# Altium PCB mypcb.PcbDoc
Units mil, origin at the board's own origin, x right, y up, seen from the top; angles counter-clockwise.
Board outline 20160 x 10575 mil, 2 copper layers (Top Layer, Bottom Layer); 123 components, 204 nets, 930 pads, 0 vias.
Unrouted connection lines stored in the file: 410.
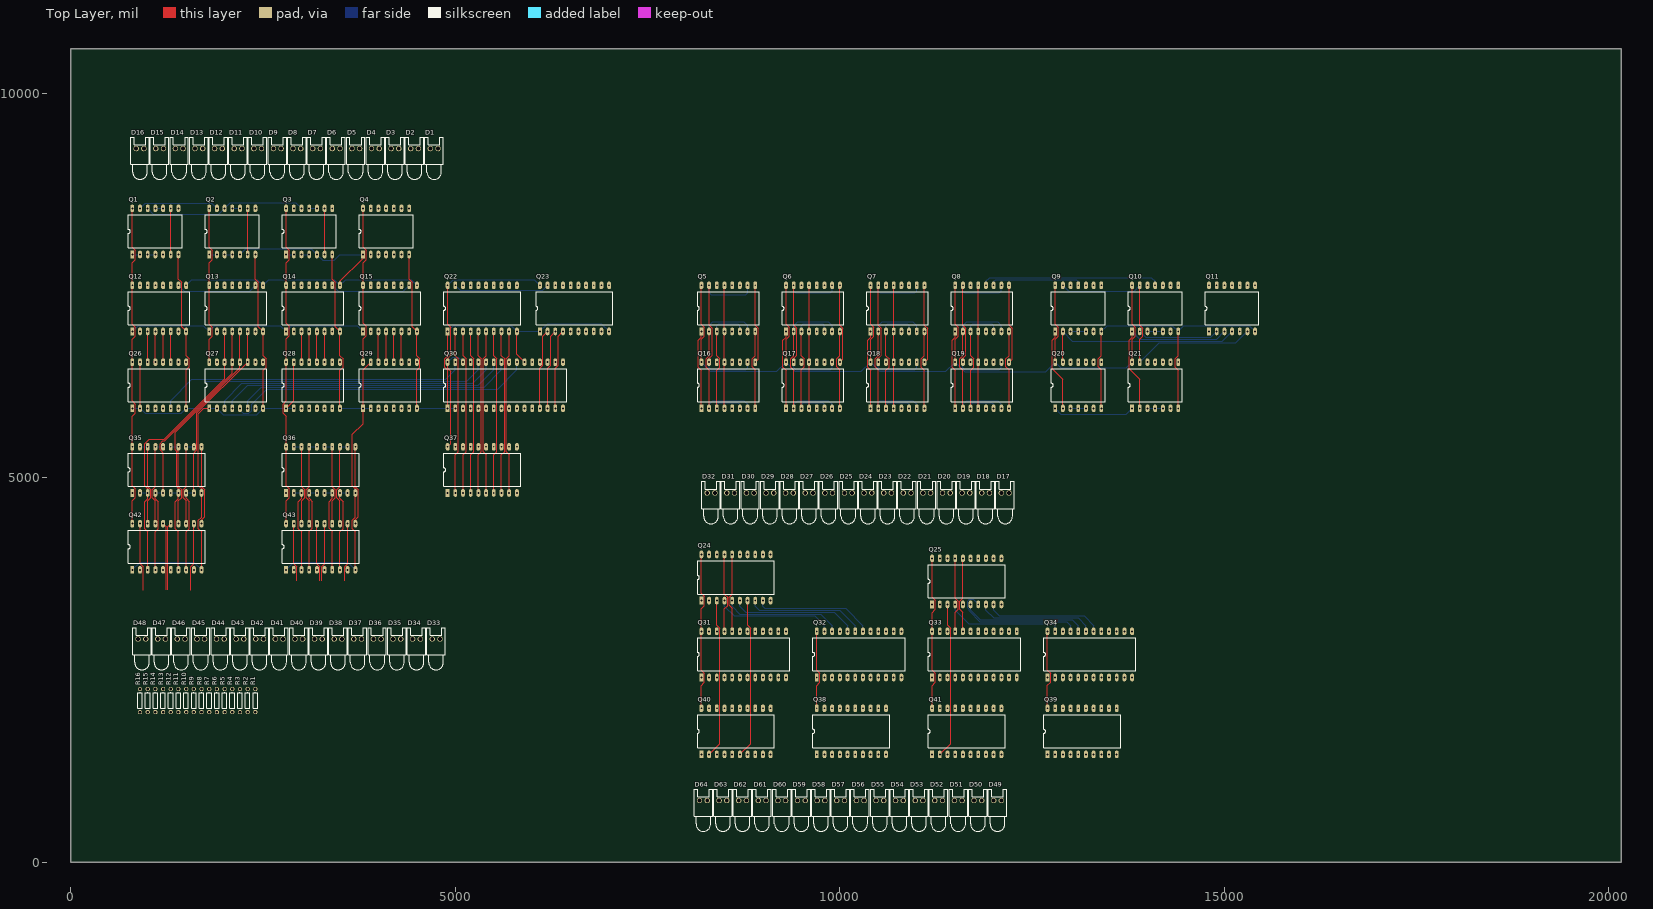
[diagram p0: Top Layer view]
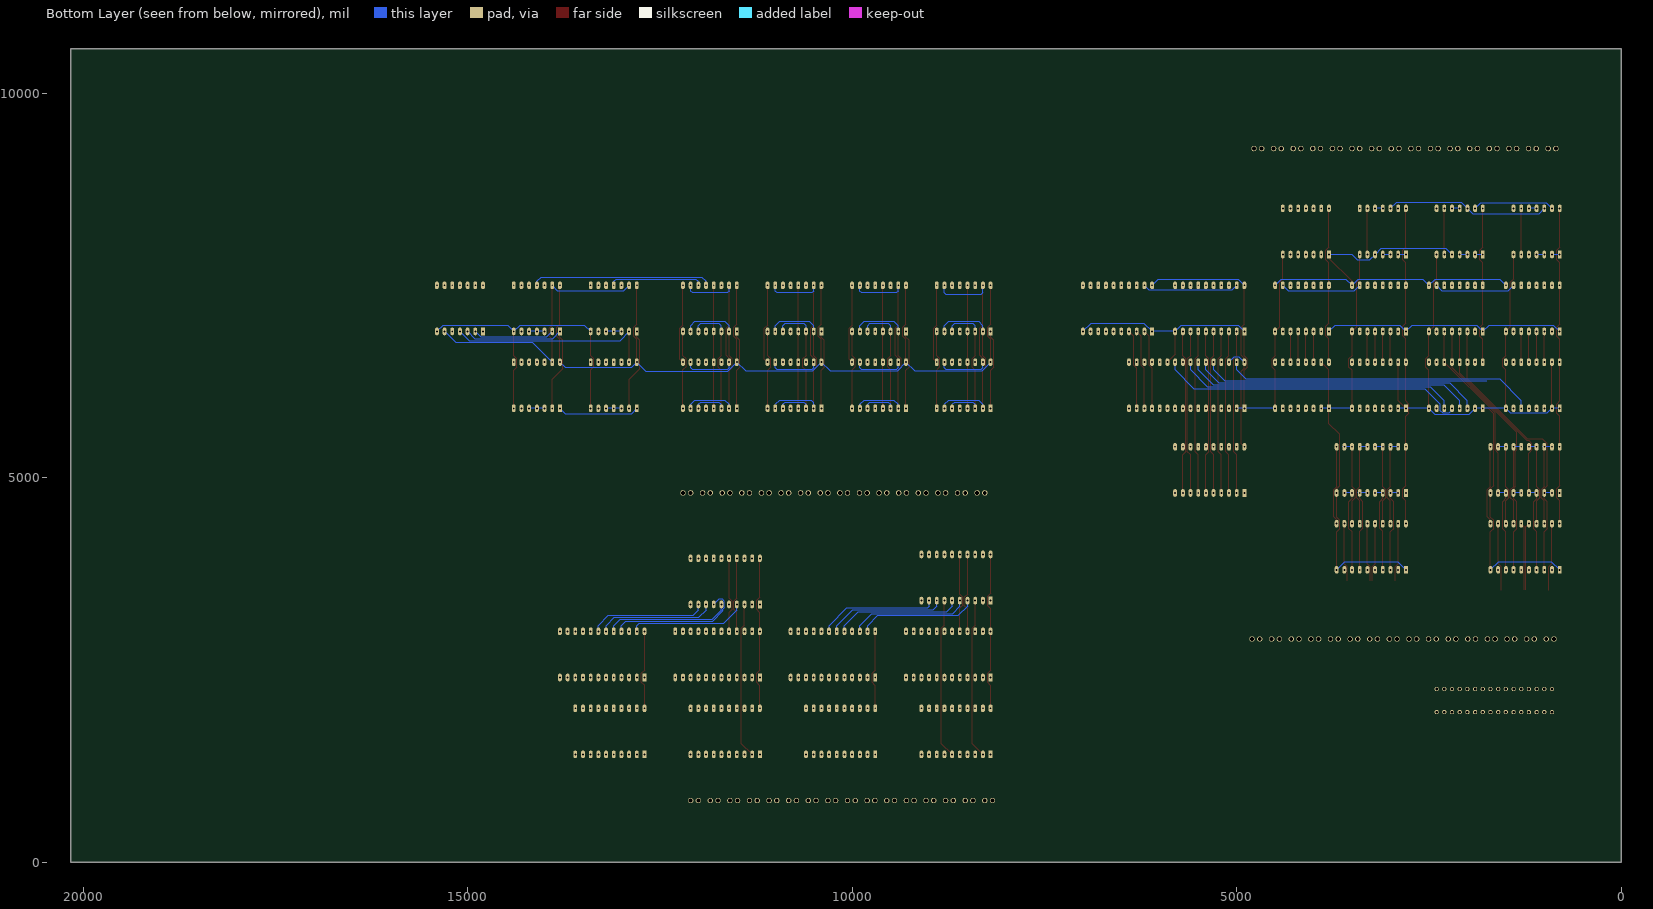
[diagram p1: Bottom Layer view, seen from below]

## Layer stack, top to bottom
Top Solder: solder mask 0.4, Solder Resist, Dk 3.5
Top Layer: signal copper 1.4
Dielectric 1: dielectric 12.6, FR-4, Dk 4.8
Bottom Layer: signal copper 1.4
Bottom Solder: solder mask 0.4, Solder Resist, Dk 3.5

## Board outline
0,0 0,10575 20160,10575 20160,0

## Design rules (kind name [scope] priority, off if disabled: settings)
Clearance [All] p1: gap=10 ignorepadtopadclearanceinfootprint=FALSE except(0: Arc-Hole Track-Hole SMDPad-Hole THPad-Hole Via-Hole Fill-Hole Poly-Hole Region-Hole Text-Hole)
PolygonConnect [All] p1: connectstyle=Relief reliefconductorwidth=10 reliefentries=4 polygonreliefangle="90 Angle" airgapwidth=10
RoutingVias [All] p1: holewidth=28 width=50 viastyle="Through Hole" minholewidth=28 minwidth=50 maxholewidth=28 maxwidth=50
SolderMaskExpansion [All] p1: expansion=4
Width [All] p1: maxlimit=10 minlimit=10 preferedwidth=10
30 further rules are at their usual default settings.

## Components (designator, comment, footprint, x,y, rotation, side; value= is the part's Value field where it differs from the comment)
D1 "LED0" LED-0 4725.15,9277.5 r0 top
D2 "LED0" LED-0 4470.14,9277.5 r0 top
D3 "LED0" LED-0 4215.13,9277.5 r0 top
D4 "LED0" LED-0 3960.12,9277.5 r0 top
D5 "LED0" LED-0 3705.11,9277.5 r0 top
D6 "LED0" LED-0 3450.1,9277.5 r0 top
D7 "LED0" LED-0 3195.09,9277.5 r0 top
D8 "LED0" LED-0 2940.08,9277.5 r0 top
D9 "LED0" LED-0 2685.07,9277.5 r0 top
D10 "LED0" LED-0 2430.06,9277.5 r0 top
D11 "LED0" LED-0 2175.05,9277.5 r0 top
D12 "LED0" LED-0 1920.04,9277.5 r0 top
D13 "LED0" LED-0 1665.03,9277.5 r0 top
D14 "LED0" LED-0 1410.02,9277.5 r0 top
D15 "LED0" LED-0 1155.01,9277.5 r0 top
D16 "LED0" LED-0 900,9277.5 r0 top
D17 "LED0" LED-0 12150,4800 r0 top
D18 "LED0" LED-0 11894.99,4800 r0 top
D19 "LED0" LED-0 11639.98,4800 r0 top
D20 "LED0" LED-0 11384.97,4800 r0 top
D21 "LED0" LED-0 11129.96,4800 r0 top
D22 "LED0" LED-0 10874.95,4800 r0 top
D23 "LED0" LED-0 10619.94,4800 r0 top
D24 "LED0" LED-0 10364.93,4800 r0 top
D25 "LED0" LED-0 10109.92,4800 r0 top
D26 "LED0" LED-0 9854.91,4800 r0 top
D27 "LED0" LED-0 9599.9,4800 r0 top
D28 "LED0" LED-0 9344.89,4800 r0 top
D29 "LED0" LED-0 9089.88,4800 r0 top
D30 "LED0" LED-0 8834.87,4800 r0 top
D31 "LED0" LED-0 8579.86,4800 r0 top
D32 "LED0" LED-0 8324.85,4800 r0 top
D33 "LED0" LED-0 4750,2900 r0 top
D34 "LED0" LED-0 4494.99,2900 r0 top
D35 "LED0" LED-0 4239.98,2900 r0 top
D36 "LED0" LED-0 3984.97,2900 r0 top
D37 "LED0" LED-0 3729.96,2900 r0 top
D38 "LED0" LED-0 3474.95,2900 r0 top
D39 "LED0" LED-0 3219.94,2900 r0 top
D40 "LED0" LED-0 2964.93,2900 r0 top
D41 "LED0" LED-0 2709.92,2900 r0 top
D42 "LED0" LED-0 2454.91,2900 r0 top
D43 "LED0" LED-0 2199.9,2900 r0 top
D44 "LED0" LED-0 1944.89,2900 r0 top
D45 "LED0" LED-0 1689.88,2900 r0 top
D46 "LED0" LED-0 1434.87,2900 r0 top
D47 "LED0" LED-0 1179.86,2900 r0 top
D48 "LED0" LED-0 924.85,2900 r0 top
D49 "LED0" LED-0 12050,800 r0 top
D50 "LED0" LED-0 11794.99,800 r0 top
D51 "LED0" LED-0 11539.98,800 r0 top
D52 "LED0" LED-0 11284.97,800 r0 top
D53 "LED0" LED-0 11029.96,800 r0 top
D54 "LED0" LED-0 10774.95,800 r0 top
D55 "LED0" LED-0 10519.94,800 r0 top
D56 "LED0" LED-0 10264.93,800 r0 top
D57 "LED0" LED-0 10009.92,800 r0 top
D58 "LED0" LED-0 9754.91,800 r0 top
D59 "LED0" LED-0 9499.9,800 r0 top
D60 "LED0" LED-0 9244.89,800 r0 top
D61 "LED0" LED-0 8989.88,800 r0 top
D62 "LED0" LED-0 8734.87,800 r0 top
D63 "LED0" LED-0 8479.86,800 r0 top
D64 "LED0" LED-0 8224.85,800 r0 top
Q1 "7400" DIP14 800,7900 r90 top
Q2 "7400" DIP14 1800,7900 r90 top
Q3 "7400" DIP14 2800,7900 r90 top
Q4 "7404" DIP14 3800,7900 r90 top
Q5 "74LS670" DIP16 8200,6900 r90 top
Q6 "74LS670" DIP16 9300,6900 r90 top
Q7 "74LS670" DIP16 10400,6900 r90 top
Q8 "74LS670" DIP16 11500,6900 r90 top
Q9 "74LS00" DIP14 12800,6900 r90 top
Q10 "74LS00" DIP14 13800,6900 r90 top
Q11 "74LS04" DIP14 14800,6900 r90 top
Q12 "74LS161" DIP16 800,6900 r90 top
Q13 "74LS161" DIP16 1800,6900 r90 top
Q14 "74LS161" DIP16 2800,6900 r90 top
Q15 "74LS161" DIP16 3800,6900 r90 top
Q16 "74LS670" DIP16 8200,5900 r90 top
Q17 "74LS670" DIP16 9300,5900 r90 top
Q18 "74LS670" DIP16 10400,5900 r90 top
Q19 "74LS670" DIP16 11500,5900 r90 top
Q20 "74LS00" DIP14 12800,5900 r90 top
Q21 "74LS00" DIP14 13800,5900 r90 top
Q22 "74LS245" DIP20 4900,6900 r90 top
Q23 "74LS245" DIP20 6100,6900 r90 top
Q24 "74LS373" DIP20 8200,3400 r90 top
Q25 "74LS373" DIP20 11200,3350 r90 top
Q26 "74LS173" DIP16 800,5900 r90 top
Q27 "74LS173" DIP16 1800,5900 r90 top
Q28 "74LS173" DIP16 2800,5900 r90 top
Q29 "74LS173" DIP16 3800,5900 r90 top
Q30 "UM61512A" DIP32 4900,5900 r90 top
Q31 "74LS181" DIP24 8200,2400 r90 top
Q32 "74LS181" DIP24 9700,2400 r90 top
Q33 "74LS181" DIP24 11200,2400 r90 top
Q34 "74LS181" DIP24 12700,2400 r90 top
Q35 "74LS373" DIP20 800,4800 r90 top
Q36 "74LS373" DIP20 2800,4800 r90 top
Q37 "74LS245" DIP20 4900,4800 r90 top
Q38 "74LS373" DIP20 9700,1400 r90 top
Q39 "74LS373" DIP20 12700,1400 r90 top
Q40 "74LS373" DIP20 8200,1400 r90 top
Q41 "74LS373" DIP20 11200,1400 r90 top
Q42 "74LS373" DIP20 800,3800 r90 top
Q43 "74LS373" DIP20 2800,3800 r90 top
R1 "Res1" AXIAL-0.3 2400,2100 r90 top value=1K
R2 "Res1" AXIAL-0.3 2300,2100 r90 top value=1K
R3 "Res1" AXIAL-0.3 2200,2100 r90 top value=1K
R4 "Res1" AXIAL-0.3 2100,2100 r90 top value=1K
R5 "Res1" AXIAL-0.3 2000,2100 r90 top value=1K
R6 "Res1" AXIAL-0.3 1900,2100 r90 top value=1K
R7 "Res1" AXIAL-0.3 1800,2100 r90 top value=1K
R8 "Res1" AXIAL-0.3 1700,2100 r90 top value=1K
R9 "Res1" AXIAL-0.3 1600,2100 r90 top value=1K
R10 "Res1" AXIAL-0.3 1500,2100 r90 top value=1K
R11 "Res1" AXIAL-0.3 1400,2100 r90 top value=1K
R12 "Res1" AXIAL-0.3 1300,2100 r90 top value=1K
R13 "Res1" AXIAL-0.3 1200,2100 r270 top value=1K
R14 "Res1" AXIAL-0.3 1100,2100 r270 top value=1K
R15 "Res1" AXIAL-0.3 1000,2100 r270 top value=1K
R16 "Res1" AXIAL-0.3 900,2100 r270 top value=1K

## Footprints (in the part's own frame and the unit in brackets; to place one, negate y for a bottom-side part, rotate by r counter-clockwise, add the part's x,y. Pads: shape width x height; smd on the part's side, far side on the other; paste and mask are expansions set on the pad)
AXIAL-0.3 [mm] "Axial Device, Thru-Hole; 2 Leads; 0.3 in Pin Spacing"
  round 1.4 hole 0.85: 1(-3.81,0) 2(3.81,0)
  silkscreen extent -2.77,-0.76 2.77,0.76
DIP14 [mil]
  rect 100x50 hole 25: 1(0,0)
  oval 100x50 hole 25: 2(0,-100) 3(0,-200) 4(0,-300) 5(0,-400) 6(0,-500) 7(0,-600) 8(600,-600) 9(600,-500) 10(600,-400) 11(600,-300) 12(600,-200) 13(600,-100) 14(600,0)
  silkscreen extent 85,-650 515,50
DIP16 [mil]
  rect 100x50 hole 25: 1(0,0)
  oval 100x50 hole 25: 2(0,-100) 3(0,-200) 4(0,-300) 5(0,-400) 6(0,-500) 7(0,-600) 8(0,-700) 9(600,-700) 10(600,-600) 11(600,-500) 12(600,-400) 13(600,-300) 14(600,-200) 15(600,-100) 16(600,0)
  silkscreen extent 85,-750 515,50
DIP20 [mil]
  rect 100x50 hole 25: 1(0,0)
  oval 100x50 hole 25: 2(0,-100) 3(0,-200) 4(0,-300) 5(0,-400) 6(0,-500) 7(0,-600) 8(0,-700) 9(0,-800) 10(0,-900) 11(600,-900) 12(600,-800) 13(600,-700) 14(600,-600) 15(600,-500) 16(600,-400) 17(600,-300) 18(600,-200) 19(600,-100) 20(600,0)
  silkscreen extent 85,-950 515,50
DIP24 [mil]
  rect 100x50 hole 25: 1(0,0)
  oval 100x50 hole 25: 2(0,-100) 3(0,-200) 4(0,-300) 5(0,-400) 6(0,-500) 7(0,-600) 8(0,-700) 9(0,-800) 10(0,-900) 11(0,-1000) 12(0,-1100) 13(600,-1100) 14(600,-1000) 15(600,-900) 16(600,-800) 17(600,-700) 18(600,-600) 19(600,-500) 20(600,-400) 21(600,-300) 22(600,-200) 23(600,-100) 24(600,0)
  silkscreen extent 85,-1150 515,50
DIP32 [mil]
  rect 100x50 hole 25: 1(0,0)
  oval 100x50 hole 25: 2(0,-100) 3(0,-200) 4(0,-300) 5(0,-400) 6(0,-500) 7(0,-600) 8(0,-700) 9(0,-800) 10(0,-900) 11(0,-1000) 12(0,-1100) 13(0,-1200) 14(0,-1300) 15(0,-1400) 16(0,-1500) 17(600,-1500) 18(600,-1400) 19(600,-1300) 20(600,-1200) 21(600,-1100) 22(600,-1000) 23(600,-900) 24(600,-800) 25(600,-700) 26(600,-600) 27(600,-500) 28(600,-400) 29(600,-300) 30(600,-200) 31(600,-100) 32(600,0)
  silkscreen extent 85,-1550 515,50
LED-0 [mil] "LED; 2 Leads"
  round 70 hole 50: 1(50,0) 2(-50,0)
  silkscreen extent -120,-400 120,150

## Part data
D1 D2 D3 D4 D5 D6 D7 D8 D9 D10 D11 D12 D13 D14 D15 D16 D17 D18 D19 D20 D21 D22 D23 D24 D25 D26 D27 D28 D29 D30 D31 D32 D33 D34 D35 D36 D37 D38 D39 D40 D41 D42 D43 D44 D45 D46 D47 D48 D49 D50 D51 D52 D53 D54 D55 D56 D57 D58 D59 D60 D61 D62 D63 D64: "Typical INFRARED GaAs LED", LatestRevisionDate=08-Jul-2005, LatestRevisionNote="Mech Layer 1 removed.", PackageDescription="LED; 2 Leads", PackageReference=LED-0, Published=8-Jun-2000, Publisher="Altium Limited"
Q1 Q2 Q3 Q12 Q13 Q14 Q15: "4-BIT BINARY COUNTERS"
Q4 Q11: "Hex Inverting Gates"
Q5 Q6 Q7 Q8 Q16 Q17 Q18 Q19: "4-BY-4 REGISTER FILES WITH 3-STATE OUTPUTS"
Q9 Q10 Q20 Q21: "Quad 2-Input NAND Gate"
Q22 Q23 Q37: "OCTAL BUS TRANSCEIVER"
Q24 Q25 Q35 Q36 Q38 Q39 Q40 Q41 Q42 Q43: "OCTAL TRANSPARENT LATCH WITH 3-STATE OUTPUTS"
Q26 Q27 Q28 Q29: "4-BIT D-TYPE REGISTERS WITH 3-STATE OUTPUTS"
Q30: "64K X 8 BIT HIGH SPEED CMOS SRAM"
Q31 Q32 Q33 Q34: "4-Bit Arithmetic Logic Unit"
R1 R2 R3 R4 R5 R6 R7 R8 R9 R10 R11 R12 R13 R14 R15 R16: "Resistor", LatestRevisionDate=17-Jul-2002, LatestRevisionNote="Re-released for DXP Platform.", PackageDescription="Axial Device, Thru-Hole; 2 Leads; 0.3 in Pin Spacing", PackageReference=AXIAL-0.3, Published=8-Jun-2000, Publisher="Altium Limited"

## Nets (pads, with @x,y where several pads share a name; then routed paths per layer and width w, separated by ;. In a path a pad name is that pad's centre, name@x,y a point inside that pad or via, vN(x,y) a via of type N, cw(c..) or ccw(c..) an arc to the next point about the centre after c; other vN are vias at no path point)
"ALU B0": Q25.2 Q34.1
"ALU B1": Q25.5 Q34.22
"ALU B2": Q25.6 Q34.20 | length 1632.8
  Bottom Layer w10: Q25.6 11700,3275 11825,3150 13025,3150 13100,3075 Q34.20
"ALU B3": Q25.9 Q34.18 | length 1532.8
  Bottom Layer w10: Q25.9 12000,3275 12075,3200 13175,3200 13300,3075 Q34.18
"ALU B4": Q25.12 Q33.1
"ALU B5": Q25.15 Q33.22
"ALU B6": Q25.16 Q33.20 | length 983.1
  Top Layer w10: Q33.20 11600,3250 11560,3290 11560,3391.57 11600,3431.57 Q25.16
"ALU B7": Q25.19 Q33.18
"ALU B8": Q24.2 Q32.1
"ALU B9": Q24.5 Q32.22 | length 1553.6
  Bottom Layer w10: Q24.5 8600,3325 8700,3225 9750,3225 9900,3075 Q32.22
"ALU B10": Q24.6 Q32.20 | length 1678.6
  Bottom Layer w10: Q24.6 8700,3325 8775,3250 9925,3250 10100,3075 Q32.20 Q32.20@10100,2975
"ALU B11": Q24.9 Q32.18 | length 1553.6
  Bottom Layer w10: Q24.9 9000,3325 9025,3300 10075,3300 10300,3075 Q32.18
"ALU B12": Q24.12 Q31.1
"ALU B13": Q24.15 Q31.22
"ALU B14": Q24.16 Q31.20 | length 1033.1
  Top Layer w10: Q31.20 8600,3300 8560,3340 8560,3441.57 8600,3481.57 Q24.16
"ALU B15": Q24.19 Q31.18
"ALU CARRY 0": Q33.7 Q34.16
"ALU CARRY 1": Q32.7 Q33.16
"ALU CARRY 2": Q31.7 Q32.16
"ALU MODE": Q31.8 Q32.8 Q33.8 Q34.8
"ALU OPB WR": Q24.11 Q25.11
"ALU OUT 0": Q34.9 Q39.3 Q41.3
"ALU OUT 1": Q34.10 Q39.4 Q41.4
"ALU OUT 2": Q34.11 Q39.7 Q41.7
"ALU OUT 3": Q34.13 Q39.8 Q41.8
"ALU OUT 4": Q33.9 Q39.13 Q41.13
"ALU OUT 5": Q33.10 Q39.14 Q41.14
"ALU OUT 6": Q33.11 Q39.17 Q41.17
"ALU OUT 7": Q33.13 Q39.18 Q41.18
"ALU OUT 8": Q32.9 Q38.3 Q40.3
"ALU OUT 9": Q32.10 Q38.4 Q40.4
"ALU OUT 10": Q32.11 Q38.7 Q40.7
"ALU OUT 11": Q32.13 Q38.8 Q40.8
"ALU OUT 12": Q31.9 Q38.13 Q40.13
"ALU OUT 13": Q31.10 Q38.14 Q40.14
"ALU OUT 14": Q31.11 Q38.17 Q40.17
"ALU OUT 15": Q31.13 Q38.18 Q40.18
"ALU OUT R": Q38.1 Q39.1
"ALU OUT WR": Q38.11 Q39.11 Q40.11 Q41.11
"ALU SEL 0": Q31.6 Q32.6 Q33.6 Q34.6
"ALU SEL 1": Q31.5 Q32.5 Q33.5 Q34.5
"ALU SEL 2": Q31.4 Q32.4 Q33.4 Q34.4
"ALU SEL 3": Q31.3 Q32.3 Q33.3 Q34.3
"BUS 0": Q8.10 Q8.15 Q15.3 Q19.10 Q19.15 Q23.2 Q25.3 Q25.10 Q29.14 Q30.13 Q34.2 Q36.2 Q36.3 Q37.18 Q39.2 Q43.3 | length 7018.7
  Top Layer w10: Q43.3 3000,4295 2960,4335 2960,4688.28 3000,4728.28 Q36.3 ; Q29.14@4000,6480 Q29.14 Q15.3 ; Q30.13 6100,6418.43 6140,6458.43 6140,6840 Q23.2 ; 11300,1400 11440,1540 11440,3041.57 11400,3081.57 Q25.3 ; Q19.15 11600,6553.28 11640,6593.28 11640,6941.57 11600,6981.57 Q8.15
  Bottom Layer w10: Q36.2 Q36.3 3025,4800 ; Q19.15 11600,6425 11625,6400 12075,6400 12100,6425 Q19.10 ; Q8.15 11600,7425 11625,7400 12075,7400 12100,7425 Q8.10
"BUS 1": Q8.1 Q8.9 Q15.4 Q19.1 Q19.9 Q23.3 Q25.4 Q29.13 Q30.14 Q34.23 Q36.4 Q36.5 Q37.17 Q39.5 Q43.4 | length 6227
  Top Layer w10: Q43.4 3100,4300 3140,4340 3140,4688.28 3100,4728.28 Q36.4 ; Q15.4 Q29.13 Q29.13@4120,6480 ; Q30.14 6200,6418.43 6240,6458.43 6240,6840 Q23.3 ; Q19.1@11500,5875 Q19.1 11500,6395 11460,6435 11460,6783.28 11500,6823.28 Q8.1 ; Q19.9 12240,6540 12240,6941.57 12200,6981.57 Q8.9
  Bottom Layer w10: Q36.4 Q36.5 ; Q25.4 11500,3275 11675,3100 12775,3100 12800,3075 Q34.23
"BUS 2": Q8.2 Q8.7 Q15.5 Q19.2 Q19.7 Q23.4 Q25.7 Q29.12 Q30.15 Q34.21 Q36.6 Q36.7 Q37.16 Q39.6 Q43.7 | length 6819.7
  Top Layer w10: Q43.7 3400,4300 3360,4340 3360,4688.28 3400,4728.28 Q36.7 ; Q29.12@4200,6480 Q29.12 Q15.5 ; Q30.15 6300,6418.43 6340,6458.43 6340,6840 Q23.4 ; Q19.2@11600,5875 Q19.2 11600,6395 11560,6435 11560,6541.57 11600,6581.57 Q8.2
  Bottom Layer w10: Q36.6 Q36.7 3425,4800 ; Q19.2 11600,5950 11650,6000 12050,6000 12100,5950 Q19.7 ; Q8.2 11600,6975 11650,7025 12050,7025 12100,6975 Q8.7 Q8.7@12100,6875 ; Q25.7 11735,3415 11683.43,3415 11660,3391.57 11660,3308.43 11680,3288.43 11680,3266.72 11821.72,3125 12950,3125 13000,3075 Q34.21
"BUS 3": Q8.3 Q8.6 Q15.6 Q19.3 Q19.6 Q23.5 Q25.8 Q29.11 Q30.17 Q34.19 Q36.8 Q36.9 Q37.15 Q39.9 Q43.8 | length 5043.8
  Top Layer w10: Q43.8 3500,4295 3540,4335 3540,4688.28 3500,4728.28 Q36.8 ; Q15.6 Q29.11 Q29.11@4320,6480 ; Q19.3 11700,6395 11740,6435 11740,6541.57 11700,6581.57 Q8.3
  Bottom Layer w10: Q36.8 Q36.9 ; Q19.3 11700,5950 11725,5975 11975,5975 12000,5950 Q19.6 ; Q8.3 11700,6975 11725,7000 11975,7000 12000,6975 Q8.6 Q8.6@12000,6875 ; Q25.8 11900,3275 12000,3175 13100,3175 13200,3075 Q34.19
"BUS 4": Q7.10 Q7.15 Q14.3 Q18.10 Q18.15 Q23.6 Q25.13 Q28.14 Q30.18 Q33.2 Q36.12 Q36.13 Q37.14 Q39.12 Q43.13 | length 3977.7
  Top Layer w10: Q28.14@3000,6480 Q28.14 Q14.3 ; Q43.13 3500,4700 3460,4740 3460,4841.57 3500,4881.57 Q36.13 ; Q18.15 10500,6553.28 10540,6593.28 10540,6941.57 10500,6981.57 Q7.15
  Bottom Layer w10: Q36.13 Q36.12 3625,5400 ; Q18.15 10500,6425 10525,6400 10975,6400 11000,6425 Q18.10 Q18.10@11000,6525 ; Q7.15 10500,7425 10525,7400 10975,7400 11000,7425 Q7.10
"BUS 5": Q7.1 Q7.9 Q14.4 Q18.1 Q18.9 Q23.7 Q25.14 Q28.13 Q30.19 Q33.23 Q36.14 Q36.15 Q37.13 Q39.15 Q43.14 | length 3639.4
  Top Layer w10: Q28.13@3100,6480 Q28.13 Q14.4 ; Q43.14 3400,4700 3440,4740 3440,4841.57 3400,4881.57 Q36.14 ; Q18.1 10400,6395 10360,6435 10360,6783.28 10400,6823.28 Q7.1 ; Q18.9@11080,6500 Q18.9 11140,6540 11140,6941.57 11100,6981.57 Q7.9
  Bottom Layer w10: Q36.15 Q36.14
"BUS 6": Q7.2 Q7.7 Q14.5 Q18.2 Q18.7 Q23.8 Q25.17 Q28.12 Q30.20 Q33.21 Q36.16 Q36.17 Q37.12 Q39.16 Q43.17 | length 4900.2
  Top Layer w10: Q43.17 3100,4700 3060,4740 3060,4841.57 3100,4881.57 Q36.17 ; Q14.5 Q28.12 Q28.12@3220,6480 ; Q18.2 10500,6400 10460,6440 10460,6541.57 10500,6581.57 Q7.2 ; Q33.21 11500,3250 11540,3290 11540,3391.57 11500,3431.57 Q25.17
  Bottom Layer w10: Q36.17 Q36.16 3225,5400 ; Q18.2 10500,5975 10525,6000 10950,6000 11000,5950 ; Q7.2 10500,6975 10550,7025 10950,7025 11000,6975 Q7.7
"BUS 7": Q7.3 Q7.6 Q14.6 Q18.3 Q18.6 Q23.9 Q25.18 Q28.11 Q30.21 Q33.19 Q36.18 Q36.19 Q37.11 Q39.19 Q43.18 | length 3462.7
  Top Layer w10: Q43.18 3000,4700 3040,4740 3040,4841.57 3000,4881.57 Q36.18 ; Q28.11@3300,6520 Q14.6 ; Q18.3 10600,6395 10640,6435 10640,6541.57 10600,6581.57 Q7.3
  Bottom Layer w10: Q36.19 Q36.18 3025,5400 ; Q18.3 10600,5950 10625,5975 10875,5975 10900,5950 Q18.6@10900,5925 ; Q7.3 10600,6975 10625,7000 10875,7000 10900,6975 Q7.6 Q7.6@10900,6875
"BUS 8": Q6.10 Q6.15 Q13.3 Q17.10 Q17.15 Q22.2 Q24.3 Q27.14 Q32.2 Q35.2 Q35.3 Q37.2 Q38.2 Q42.3 | length 10386.3
  Top Layer w10: Q42.3 1000,4295 960,4335 960,4683.28 1000,4723.28 Q35.3 1000,4853.28 960,4893.28 960,5441.57 1018.43,5500 1215.15,5500 2000,6284.85 Q27.14 ; Q13.3 2000,6520 Q27.14@2020,6500 ; Q37.2 5000,5295 5040,5335 5040,6541.57 5000,6581.57 Q22.2 ; 8300,1400 8440,1540 8440,3041.57 8400,3081.57 Q24.3 ; Q17.15 9400,6553.28 9440,6593.28 9440,6941.57 9400,6981.57 Q6.15
  Bottom Layer w10: Q35.2 Q35.3 ; Q17.15 9400,6425 9425,6400 9875,6400 9900,6425 Q17.10 ; Q6.15 9400,7425 9425,7400 9875,7400 9900,7425 Q6.10
"BUS 9": Q6.1 Q6.9 Q13.4 Q17.1 Q17.9 Q22.3 Q24.4 Q27.13 Q32.23 Q35.4 Q35.5 Q37.3 Q38.5 Q42.4 | length 9431.7
  Top Layer w10: Q42.4 1100,4295 1140,4335 1140,4683.28 1100,4723.28 Q35.4 ; Q35.5 1200,5318.43 1160,5358.43 1160,5441.57 1198.43,5480 1223.43,5480 2100,6356.57 Q27.13 Q13.4 ; Q37.3 5100,5295 5140,5335 5140,6541.57 5100,6581.57 Q22.3 ; Q17.1@9300,5875 Q17.1 9300,6395 9260,6435 9260,6783.28 9300,6823.28 Q6.1 ; Q17.9 10040,6540 10040,6941.57 10000,6981.57 Q6.9
  Bottom Layer w10: Q35.4 Q35.5 ; Q24.4 8500,3325 8625,3200 9675,3200 9800,3075 Q32.23
"BUS 10": Q6.2 Q6.7 Q13.5 Q17.2 Q17.7 Q22.4 Q24.7 Q27.12 Q32.21 Q35.6 Q35.7 Q37.4 Q38.6 Q42.7 | length 10146.3
  Top Layer w10: Q42.7 1400,4295 1360,4335 1360,4683.28 1400,4723.28 Q35.7 1400,4853.28 1375,4878.28 1375,5343.43 1360,5358.43 1360,5588.28 2200,6428.28 Q27.12 Q13.5 ; Q37.4 5200,5295 5240,5335 5240,6541.57 5200,6581.57 Q22.4 ; 8700,1400 8840,1540 8840,3041.57 8800,3081.57 Q24.7 ; Q17.2 9400,6395 9360,6435 9360,6541.57 9400,6581.57 Q6.2
  Bottom Layer w10: Q35.6 Q35.7 ; Q17.2 9400,5950 9450,6000 9850,6000 9900,5950 Q17.7 Q17.7@9900,5875 ; Q6.2 9400,6975 9450,7025 9850,7025 9900,6975 9900,6950
"BUS 11": Q6.3 Q6.6 Q13.6 Q17.3 Q17.6 Q22.5 Q24.8 Q27.11 Q32.19 Q35.8 Q35.9 Q37.5 Q38.9 Q42.8 | length 9134.3
  Top Layer w10: Q42.8 1500,4295 1540,4335 1540,4688.28 1500,4728.28 Q35.8 ; Q35.9 1600,5318.43 1640,5358.43 1640,5840 Q27.11 Q13.6 ; Q37.5 5300,5295 5340,5335 5340,6541.57 5300,6581.57 Q22.5 ; Q17.3 9500,6400 9540,6440 9540,6541.57 9500,6581.57 Q6.3
  Bottom Layer w10: Q35.8 Q35.9 ; Q24.8 8900,3325 8950,3275 10000,3275 10200,3075 Q32.19 Q32.19@10200,2975 ; Q17.3 9500,5950 9525,5975 9775,5975 9800,5950 Q17.6 ; Q6.3 9500,6975 9525,7000 9775,7000 9800,6975 Q6.6@9800,6925
"BUS 12": Q5.10 Q5.15 Q12.3 Q16.10 Q16.15 Q22.6 Q24.13 Q26.14 Q31.2 Q35.12 Q35.13 Q37.6 Q38.12 Q42.13 | length 6065.8
  Top Layer w10: Q26.14 Q12.3 ; Q42.13 1500,4700 1460,4740 1460,4841.57 1500,4881.57 Q35.13 ; Q37.6 5400,5295 5360,5335 5360,6541.57 5400,6581.57 Q22.6 ; Q16.15 8300,6553.28 8340,6593.28 8340,6941.57 8300,6981.57 Q5.15
  Bottom Layer w10: Q35.13 Q35.12@1575,5400 ; Q16.15 8300,6425 8325,6400 8775,6400 8800,6425 Q16.10 ; Q5.15 8300,7400 8325,7375 8775,7375 8800,7400 Q5.10
"BUS 13": Q5.1 Q5.9 Q12.4 Q16.1 Q16.9 Q22.7 Q24.14 Q26.13 Q31.23 Q35.14 Q35.15 Q37.7 Q38.15 Q42.14 | length 5740.8
  Top Layer w10: Q26.13@1080,6500 1100,6520 Q12.4 ; Q42.14 1400,4695 1440,4735 1440,4841.57 1400,4881.57 Q35.14 ; Q37.7 5500,5295 5540,5335 5540,6541.57 5500,6581.57 Q22.7 ; Q16.1 8200,6395 8160,6435 8160,6783.28 8200,6823.28 Q5.1 ; Q16.9 8940,6540 8940,6941.57 8900,6981.57 Q5.9
  Bottom Layer w10: Q35.15 Q35.14
"BUS 14": Q5.2 Q5.7 Q12.5 Q16.2 Q16.7 Q22.8 Q24.17 Q26.12 Q31.21 Q35.16 Q35.17 Q37.8 Q38.16 Q42.17 | length 7015.4
  Top Layer w10: Q42.17 1100,4695 1060,4735 1060,4841.57 1100,4881.57 Q35.17 ; Q26.12 Q12.5 ; Q37.8 5600,5295 5640,5335 5640,6541.57 5600,6581.57 Q22.8 ; Q16.2 8300,6395 8260,6435 8260,6541.57 8300,6581.57 Q5.2 ; Q31.21 8500,3295 8540,3335 8540,3441.57 8500,3481.57 Q24.17
  Bottom Layer w10: Q35.17 Q35.16 ; Q16.2 8300,5950 8350,6000 8750,6000 8800,5950 ; Q5.2 8300,6975 8350,7025 8750,7025 8800,6975 Q5.7
"BUS 15": Q5.3 Q5.6 Q12.6 Q16.3 Q16.6 Q22.9 Q24.18 Q26.11 Q31.19 Q35.18 Q35.19 Q37.9 Q38.19 Q42.18 | length 5590.8
  Top Layer w10: Q42.18@1000,4375 Q42.18 1000,4695 1040,4735 1040,4841.57 1000,4881.57 Q35.18 ; Q26.11 Q12.6 ; Q37.9 5700,5295 5660,5335 5660,6541.57 5700,6581.57 Q22.9 ; Q16.3 8400,6395 8440,6435 8440,6541.57 8400,6581.57 Q5.3
  Bottom Layer w10: Q35.19 Q35.18 1025,5400 ; Q16.3 8400,5950 8425,5975 8675,5975 8700,5950 ; Q5.3 8400,6975 8425,7000 8675,7000 8700,6975 Q5.6
CLK: Q1.12 Q2.12 Q3.12 Q15.2 | length 2124.3
  Bottom Layer w10: Q1.12 1075,8425 1925,8425 Q2.12 2075,8575 2925,8575 Q3.12
"GATE PC": Q22.19 Q23.19 | length 1253.8
  Bottom Layer w10: Q22.19 5065,7435 6135,7435 Q23.19
GND: D17.2 D18.2 D19.2 D20.2 D21.2 D22.2 D23.2 D24.2 D25.2 D26.2 D27.2 D28.2 D29.2 D30.2 D31.2 D32.2 D49.2 D50.2 D51.2 D52.2 D53.2 D54.2 D55.2 D56.2 D57.2 D58.2 D59.2 D60.2 D61.2 D62.2 D63.2 D64.2 Q1.7 Q2.7 Q3.7 Q4.7 Q5.8 Q6.8 Q7.8 Q8.8 Q9.7 Q10.7 Q11.7 Q12.8 Q13.8 Q14.8 Q15.8 Q16.8 Q17.8 Q18.8 Q19.8 Q20.7 Q21.7 Q22.1 Q22.10 Q23.1 Q23.10 Q24.1 Q24.10 Q25.1 Q26.1 Q26.2 Q26.8 Q26.15 Q27.1 Q27.2 Q27.8 Q27.15 Q28.1 Q28.2 Q28.8 Q28.15 Q29.1 Q29.2 Q29.8 Q29.15 Q30.1 Q30.2 Q30.16 Q30.22 Q31.12 Q32.12 Q33.12 Q34.12 Q35.10 Q36.10 Q37.10 Q38.10 Q39.10 Q40.1 Q40.10 Q41.1 Q41.10 Q42.1 Q42.10 Q43.1 Q43.10 R1.1 R2.1 R3.1 R4.1 R5.1 R6.1 R7.1 R8.1 R9.1 R10.1 R11.1 R12.1 R13.1 R14.1 R15.1 R16.1 | length 31767
  Top Layer w10: Q26.2 Q26.15 ; Q1.7 1400,7580 1415,7565 1416.57,7565 1440,7541.57 1440,6960 Q12.8 1500,6581.57 1540,6541.57 1540,6440 1500,6400 Q26.8 ; Q42.10 1700,4295 1660,4335 1660,4441.57 1700,4481.57 Q35.10 1700,4853.28 1660,4893.28 1660,5831.72 1728.28,5900 Q27.1 ; Q2.7 2400,7581.57 2440,7541.57 2440,6960 Q13.8 2500,6581.57 2540,6541.57 2540,6435 2500,6395 Q27.8 ; Q28.1 2900,6000 Q28.15 ; Q3.7 3400,7581.57 3440,7541.57 3440,6960 Q14.8 3500,6581.57 3540,6541.57 3540,6435 3500,6395 Q28.8 ; Q43.10 3700,4295 3660,4335 3660,4441.57 3700,4481.57 Q36.10 3700,4853.28 3660,4893.28 3660,5560 3800,5700 Q29.1 3800,6400 Q29.15 ; Q4.7 4400,7581.57 4440,7541.57 4440,6960 Q15.8 4500,6581.57 4540,6541.57 4540,6435 4500,6395 Q29.8 ; Q30.1 4900,6395 4860,6435 4860,6541.57 4900,6581.57 Q22.1 ; Q22.10 5800,6600 Q30.22 ; Q16.8 8900,6395 ; 8900,6400 8860,6440 8860,6541.57 8900,6581.57 Q5.8 ; Q17.8 10000,6400 9960,6440 9960,6541.57 10000,6581.57 Q6.8 ; Q18.8 11100,6395 11060,6435 11060,6541.57 11100,6581.57 Q7.8 ; Q19.8 12200,6400 12160,6440 12160,6541.57 12200,6581.57 Q8.8 ; Q20.7 13400,6400 13360,6440 13360,6541.57 13400,6581.57 Q9.7 ; Q21.7 14400,6395 14360,6435 14360,6541.57 14400,6581.57 Q10.7
  Bottom Layer w10: Q42.1 900,3900 1600,3900 Q42.10 ; Q26.1 Q26.2 965,5835 1435,5835 Q26.8 Q27.1 Q27.2 1985,5815 2415,5815 Q27.8 Q28.1 Q28.2 ; Q43.1 2900,3900 3600,3900 Q43.10 ; Q28.8 Q29.1 Q29.2 ; Q29.8 Q30.1 Q30.2 ; Q22.1 4975,6975 5725,6975 Q22.10 Q23.1 6200,7000 6900,7000 Q23.10 ; Q9.7 13475,6975 14325,6975 Q10.7 14475,6975 15325,6975 Q11.7
"LED ALU 0": D49.1 Q41.2
"LED ALU 1": D50.1 Q41.5
"LED ALU 2": D51.1 Q41.6
"LED ALU 3": D52.1 Q41.9
"LED ALU 4": D53.1 Q41.12
"LED ALU 5": D54.1 Q41.15
"LED ALU 6": D55.1 Q41.16
"LED ALU 7": D56.1 Q41.19
"LED ALU 8": D57.1 Q40.2
"LED ALU 9": D58.1 Q40.5
"LED ALU 10": D59.1 Q40.6
"LED ALU 11": D60.1 Q40.9
"LED ALU 12": D61.1 Q40.12
"LED ALU 13": D62.1 Q40.15
"LED ALU 14": D63.1 Q40.16
"LED ALU 15": D64.1 Q40.19
"LED ALU B0": D17.1
"LED ALU B1": D18.1
"LED ALU B2": D19.1
"LED ALU B3": D20.1
"LED ALU B4": D21.1
"LED ALU B5": D22.1
"LED ALU B6": D23.1
"LED ALU B7": D24.1
"LED ALU B8": D25.1
"LED ALU B9": D26.1
"LED ALU B10": D27.1
"LED ALU B11": D28.1
"LED ALU B12": D29.1
"LED ALU B13": D30.1
"LED ALU B14": D31.1
"LED ALU B15": D32.1
"LED MDR 0": D33.1 Q43.2
"LED MDR 1": D34.1 Q43.5
"LED MDR 2": D35.1 Q43.6
"LED MDR 3": D36.1 Q43.9
"LED MDR 4": D37.1 Q43.12 | length 756.6
  Top Layer w10: 3560,3660 3560,3841.57 3600,3881.57 Q43.12
"LED MDR 5": D38.1 Q43.15 | length 756.6
  Top Layer w10: 3260,3660 3260,3841.57 3300,3881.57 Q43.15
"LED MDR 6": D39.1 Q43.16 | length 756.6
  Top Layer w10: Q43.16 3200,3881.57 3240,3841.57 3240,3660
"LED MDR 7": D40.1 Q43.19 | length 756.6
  Top Layer w10: Q43.19 2900,3881.57 2940,3841.57 2940,3660
"LED MDR 8": D41.1 Q42.2
"LED MDR 9": D42.1 Q42.5
"LED MDR 10": D43.1 Q42.6
"LED MDR 11": D44.1 Q42.9
"LED MDR 12": D45.1 Q42.12 | length 881.6
  Top Layer w10: 1560,3535 1560,3841.57 1600,3881.57 Q42.12
"LED MDR 13": D46.1 Q42.15 | length 876.6
  Top Layer w10: 1260,3540 1260,4360 Q42.15
"LED MDR 14": D47.1 Q42.16 | length 876.6
  Top Layer w10: Q42.16 1240,4360 1240,3540
"LED MDR 15": D48.1 Q42.19 | length 881.6
  Top Layer w10: Q42.19 900,3881.57 940,3841.57 940,3535
"LED PC 0": D1.2 Q15.14 Q23.18
"LED PC 1": D2.2 Q15.13 Q23.17
"LED PC 2": D3.2 Q15.12 Q23.16
"LED PC 3": D4.2 Q15.11 Q23.15
"LED PC 4": D5.2 Q14.14 Q23.14
"LED PC 5": D6.2 Q14.13 Q23.13
"LED PC 6": D7.2 Q14.12 Q23.12
"LED PC 7": D8.2 Q14.11 Q23.11
"LED PC 8": D9.2 Q13.14 Q22.18
"LED PC 9": D10.2 Q13.13 Q22.17
"LED PC 10": D11.2 Q13.12 Q22.16
"LED PC 11": D12.2 Q13.11 Q22.15
"LED PC 12": D13.2 Q12.14 Q22.14
"LED PC 13": D14.2 Q12.13 Q22.13
"LED PC 14": D15.2 Q12.12 Q22.12
"LED PC 15": D16.2 Q12.11 Q22.11
"MAR 0": Q29.3 Q30.12
"MAR 1": Q29.4 Q30.11
"MAR 2": Q29.5 Q30.10
"MAR 3": Q29.6 Q30.9
"MAR 4": Q28.3 Q30.8
"MAR 5": Q28.4 Q30.7
"MAR 6": Q28.5 Q30.6
"MAR 7": Q28.6 Q30.5
"MAR 8": Q27.3 Q30.27 | length 3765.7
  Bottom Layer w10: Q27.3 2000,6000 2225,6225 5225,6225 5400,6400 Q30.27
"MAR 9": Q27.4 Q30.26 | length 3765.7
  Bottom Layer w10: Q27.4 2100,6000 2300,6200 2900,6200 5271.72,6200 5300,6200 5500,6400 Q30.26
"MAR 10": Q27.5 Q30.23 | length 4023.4
  Bottom Layer w10: Q27.5 2200,5875 2240,5835 2316.57,5835 2350,5868.43 2350,5950 2550,6150 5550,6150 5800,6400 Q30.23
"MAR 11": Q27.6 Q30.25 | length 3665.7
  Bottom Layer w10: Q27.6 2300,6000 2475,6175 5286.99,6175 5375,6175 5600,6400 Q30.25
"MAR 12": Q26.3 Q30.4
"MAR 13": Q26.4 Q30.28 | length 3712.1
  Bottom Layer w10: 1750,6250 5150,6250 5300,6400 Q30.28
"MAR 14": Q26.5 Q30.3
"MAR 15": Q26.6 Q30.31 | length 4065.7
  Bottom Layer w10: Q26.6 1300,6000 1575,6275 4875,6275 5000,6400 Q30.31
"MDR R": Q35.1 Q36.1
"MDR W": Q35.11 Q36.11 Q42.11 Q43.11 | length 2066.3
  Top Layer w10: Q42.11 1700,4453.28 1740,4493.28 1740,4841.57 1700,4881.57 Q35.11 ; Q43.11 3700,4453.28 3740,4493.28 3740,4841.57 3700,4881.57 Q36.11
"MEM R": Q30.24
"MEM W": Q30.29
NetD33_2: D33.2 R1.2
NetD34_2: D34.2 R2.2
NetD35_2: D35.2 R3.2
NetD36_2: D36.2 R4.2
NetD37_2: D37.2 R5.2
NetD38_2: D38.2 R6.2
NetD39_2: D39.2 R7.2
NetD40_2: D40.2 R8.2
NetD41_2: D41.2 R9.2
NetD42_2: D42.2 R10.2
NetD43_2: D43.2 R11.2
NetD44_2: D44.2 R12.2
NetD45_2: D45.2 R13.2
NetD46_2: D46.2 R14.2
NetD47_2: D47.2 R15.2
NetD48_2: D48.2 R16.2
NetQ1_1: Q1.1 Q1.2 Q13.15 | length 100
  Bottom Layer w10: Q1.1 Q1.2
NetQ1_3: Q1.3 Q1.4 | length 120
  Top Layer w10: Q1.4 Q1.4@1120,7900
  Bottom Layer w10: Q1.3 Q1.4
NetQ1_6: Q1.6 Q1.9 | length 600
  Top Layer w10: Q1.6 Q1.9
NetQ1_8: Q1.8 Q12.2
NetQ1_10: Q1.10 Q1.11 | length 128.3
  Bottom Layer w10: Q1.11 Q1.10 Q1.10@1220,8480
NetQ2_1: Q2.1 Q2.2 Q14.15 | length 100
  Bottom Layer w10: Q2.1 Q2.2
NetQ2_3: Q2.3 Q2.4 | length 100
  Bottom Layer w10: Q2.3 Q2.4
NetQ2_6: Q2.6 Q2.9 | length 600
  Top Layer w10: Q2.6 Q2.9
NetQ2_8: Q2.8 Q13.2
NetQ2_10: Q2.10 Q2.11 | length 108.3
  Bottom Layer w10: Q2.11@2100,8480 2120,8500 Q2.10
NetQ3_1: Q3.1 Q3.2 Q15.15 | length 100
  Bottom Layer w10: Q3.1 Q3.2
NetQ3_3: Q3.3 Q3.4 | length 100
  Bottom Layer w10: Q3.3 Q3.4
NetQ3_6: Q3.6 Q3.9 | length 620
  Top Layer w10: Q3.6@3300,7880 Q3.6 Q3.9
NetQ3_8: Q3.8 Q14.2
NetQ3_10: Q3.10 Q3.11 | length 100
  Bottom Layer w10: Q3.11 Q3.10
NetQ3_13: Q3.13 Q4.2
NetQ9_3: Q9.3 Q9.4 Q9.5 | length 200
  Bottom Layer w10: Q9.3 Q9.4 Q9.5
NetQ9_6: Q9.6 Q9.12
NetQ10_3: Q10.3 Q10.4 Q10.5 | length 200
  Bottom Layer w10: Q10.3 Q10.4 Q10.5
NetQ10_6: Q10.6 Q10.12
NetQ20_3: Q20.3 Q20.4 Q20.5 | length 200
  Bottom Layer w10: Q20.3 Q20.4 Q20.5
NetQ20_6: Q20.6 Q20.12
NetQ21_3: Q21.3 Q21.4 Q21.5 | length 200
  Bottom Layer w10: Q21.3 Q21.4 Q21.5
NetQ21_6: Q21.6 Q21.12
"PC EN": Q12.10 Q13.10 Q14.10 Q15.10 | length 2124.3
  Bottom Layer w10: Q12.10 1475,7425 2325,7425 Q13.10 ; Q14.10 3475,7425 4325,7425 Q15.10
"PC RST": Q4.12 Q12.1 Q13.1 Q14.1 Q15.1 | length 3186.4
  Bottom Layer w10: Q12.1 875,6975 1725,6975 Q13.1 1875,6975 2725,6975 Q14.1 2875,6975 3725,6975 Q15.1
"PC RST SW": Q4.13
"PC SET": Q1.5 Q2.5 Q3.5 Q4.1 Q12.9 Q13.9 Q14.9 Q15.9 | length 5434.9
  Top Layer w10: Q14.9 3500,7550 3800,7850 Q4.1
  Bottom Layer w10: Q12.9 1575,7575 2425,7575 Q13.9 2575,7575 3425,7575 Q14.9 3575,7575 4425,7575 Q15.9 ; Q2.5 2275,7975 3125,7975 Q3.5 3275,7825 3425,7825 3500,7900 Q4.1
"RF BOT READ": Q16.11 Q17.11 Q18.11 Q19.11 Q20.11
"RF BOT WR": Q16.12 Q17.12 Q18.12 Q19.12 Q21.11
"RF R": Q9.1 Q11.1 Q20.2 | length 1074.6
  Top Layer w10: Q9.1 12800,6823.28 12760,6783.28 12760,6415 12900,6275 Q20.2
"RF R0": Q5.5 Q5.14 Q6.5 Q6.14 Q7.5 Q7.14 Q8.5 Q8.14 Q16.5 Q16.14 Q17.5 Q17.14 Q18.5 Q18.14 Q19.5 Q19.14
"RF R1": Q5.4 Q5.13 Q6.4 Q6.13 Q7.4 Q7.13 Q8.4 Q8.13 Q16.4 Q16.13 Q17.4 Q17.13 Q18.4 Q18.13 Q19.4 Q19.13 | length 6425
  Top Layer w10: Q16.4 Q16.13 Q5.4 Q5.13 ; Q17.4 Q17.13 Q6.4 Q6.13 ; Q18.4 Q18.13 Q7.4 Q7.13 ; Q19.4@11800,5875 Q19.4 Q19.13 Q8.4 Q8.13
"RF R2": Q11.5 Q20.1 Q21.1 | length 1062.1
  Bottom Layer w10: Q20.1 12875,5825 13725,5825 Q21.1
"RF R2P": Q9.13 Q10.13 Q11.6 Q21.13 | length 3686
  Top Layer w10: Q21.13@13900,6475 Q21.13 13900,6795 13940,6835 13940,6941.57 13900,6981.57 Q10.13
  Bottom Layer w10: Q9.13 12975,7425 13825,7425 Q10.13 ; Q21.13 14150,6750 15150,6750 Q11.6
"RF RP": Q10.2 Q11.2 | length 1062.1
  Bottom Layer w10: Q10.2 13975,6825 14825,6825 Q11.2
"RF TOP READ": Q5.11 Q6.11 Q7.11 Q8.11 Q9.11 | length 1220.7
  Bottom Layer w10: Q8.11 12000,7550 12025,7575 13075,7575 13100,7550 Q9.11
"RF TOP WR": Q5.12 Q6.12 Q7.12 Q8.12 Q10.11 | length 2341.4
  Bottom Layer w10: Q8.12 11900,7550 11950,7600 14050,7600 14100,7550 Q10.11
"RF W": Q10.1 Q11.3 Q21.2 | length 2357.4
  Top Layer w10: Q10.1 13800,6823.28 13760,6783.28 13760,6415 13900,6275 Q21.2
  Bottom Layer w10: Q10.1 13900,6800 14900,6800 Q11.3
"RF WP": Q9.2 Q11.4 Q20.13 | length 2728.6
  Top Layer w10: Q20.13@12900,6475 Q20.13 Q9.2
  Bottom Layer w10: Q9.2 13025,6775 14975,6775 Q11.4
"SW PC": Q1.13 Q2.13 | length 1053.8
  Bottom Layer w10: Q1.13 965,8565 1835,8565 Q2.13
VCC: D1.1 D2.1 D3.1 D4.1 D5.1 D6.1 D7.1 D8.1 D9.1 D10.1 D11.1 D12.1 D13.1 D14.1 D15.1 D16.1 Q1.14 Q2.14 Q3.14 Q4.14 Q5.16 Q6.16 Q7.16 Q8.16 Q9.14 Q10.14 Q11.14 Q12.7 Q12.16 Q13.7 Q13.16 Q14.7 Q14.16 Q15.7 Q15.16 Q16.16 Q17.16 Q18.16 Q19.16 Q20.14 Q21.14 Q22.20 Q23.20 Q24.20 Q25.20 Q26.16 Q27.16 Q28.16 Q29.16 Q30.30 Q30.32 Q31.24 Q32.24 Q33.24 Q34.24 Q35.20 Q36.20 Q37.20 Q38.20 Q39.20 Q40.20 Q41.20 Q42.20 Q43.20 | length 34699.2
  Top Layer w10: Q42.20 800,4695 840,4735 840,4856.21 800,4896.21 Q35.20 800,5795 840,5835 840,5956.21 800,5996.21 Q26.16 800,6795 840,6835 840,6956.21 800,6996.21 Q12.16 800,7795 840,7835 840,7956.21 800,7996.21 Q1.14 ; Q27.16 1800,6795 1840,6835 1840,6956.21 1800,6996.21 Q13.16 1800,7795 1840,7835 1840,7956.21 1800,7996.21 Q2.14 ; Q43.20 2800,4695 2840,4735 2840,4856.21 2800,4896.21 Q36.20 2800,5795 2760,5835 2760,5956.21 2800,5996.21 Q28.16 2800,6803.79 2840,6843.79 2840,6965 2800,7005 Q14.16 2800,7795 2840,7835 2840,7956.21 2800,7996.21 Q3.14 ; Q29.16 3800,6803.79 3840,6843.79 3840,6965 3800,7005 Q15.16 3800,7795 3840,7835 3840,7956.21 3800,7996.21 Q4.14 ; Q37.20 4940,5440 4940,6383.28 4900,6423.28 Q30.32 4900,6553.28 4940,6593.28 4940,6956.21 4900,6996.21 Q22.20 ; Q40.20@8200,1975 Q40.20 8200,2295 8240,2335 8240,2456.21 8200,2496.21 Q31.24 8200,3295 8240,3335 8240,3456.21 8200,3496.21 Q24.20 ; Q16.16 8200,6795 8240,6835 8240,6956.21 8200,6996.21 Q5.16 ; Q17.16 9300,6795 9340,6835 9340,6956.21 9300,6996.21 Q6.16 ; Q38.20@9700,2025 9700,2295 9740,2335 9740,2456.21 9700,2496.21 Q32.24 ; Q18.16 10400,6795 10440,6835 10440,6956.21 10400,6996.21 Q7.16 ; Q41.20 11200,2295 11240,2335 11240,2456.21 11200,2496.21 Q33.24 11200,3245 11240,3285 11240,3406.21 11200,3446.21 Q25.20 ; Q19.16 11500,6795 11540,6835 11540,6956.21 11500,6996.21 Q8.16 ; Q39.20 12700,2300 12740,2340 12740,2456.21 12700,2496.21 Q34.24 ; Q20.14 12800,6795 12840,6835 12840,6956.21 12800,6996.21 Q9.14 ; Q21.14 13800,6795 13840,6835 13840,6956.21 13800,6996.21 Q10.14
  Bottom Layer w10: Q30.32 4965,6565 5035,6565 Q30.30 ; Q22.20 4975,7575 6025,7575 Q23.20 ; Q16.16 8200,6496.72 8316.72,6380 9180,6380 Q17.16 9300,6496.72 9416.72,6380 10280,6380 Q18.16 10400,6496.72 10516.72,6380 11380,6380 Q19.16 11500,6496.72 11621.72,6375 12675,6375 Q20.14 12875,6425 13725,6425 Q21.14
pads on no net: Q4.3 Q4.4 Q4.5 Q4.6 Q4.8 Q4.9 Q4.10 Q4.11 Q9.8 Q9.9 Q9.10 Q10.8 Q10.9 Q10.10 Q11.8 Q11.9 Q11.10 Q11.11 Q11.12 Q11.13 Q12.15 Q20.8 Q20.9 Q20.10 Q21.8 Q21.9 Q21.10 Q26.7 Q26.9 Q26.10 Q27.7 Q27.9 Q27.10 Q28.7 Q28.9 Q28.10 Q29.7 Q29.9 Q29.10 Q31.14 Q31.15 Q31.16 Q31.17 Q32.14 Q32.15 Q32.17 Q33.14 Q33.15 Q33.17 Q34.7 Q34.14 Q34.15 Q34.17 Q37.1 Q37.19